# Allegro board 0419_MULTIBB.brd
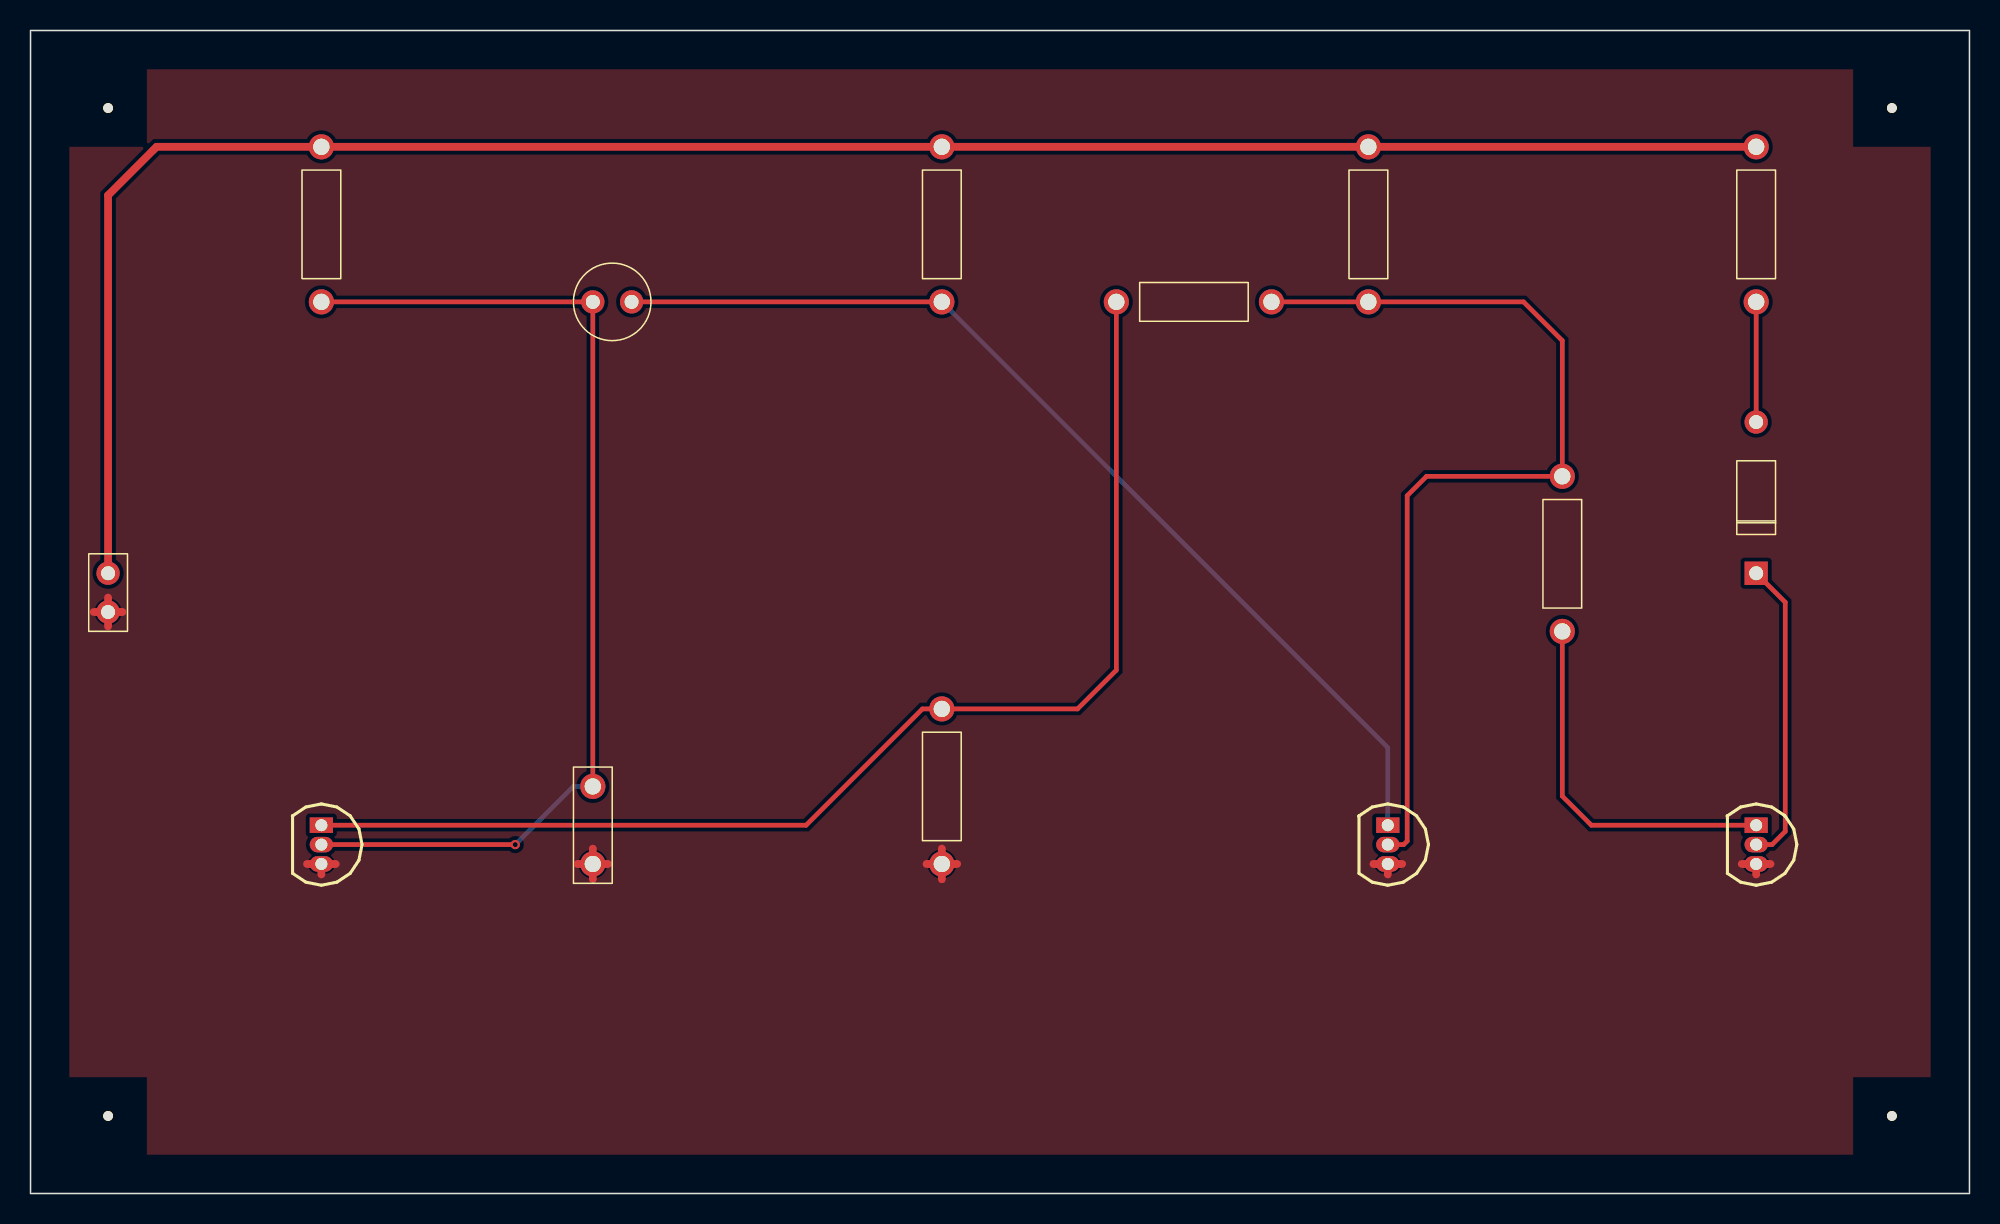
[diagram p0: board, top side]
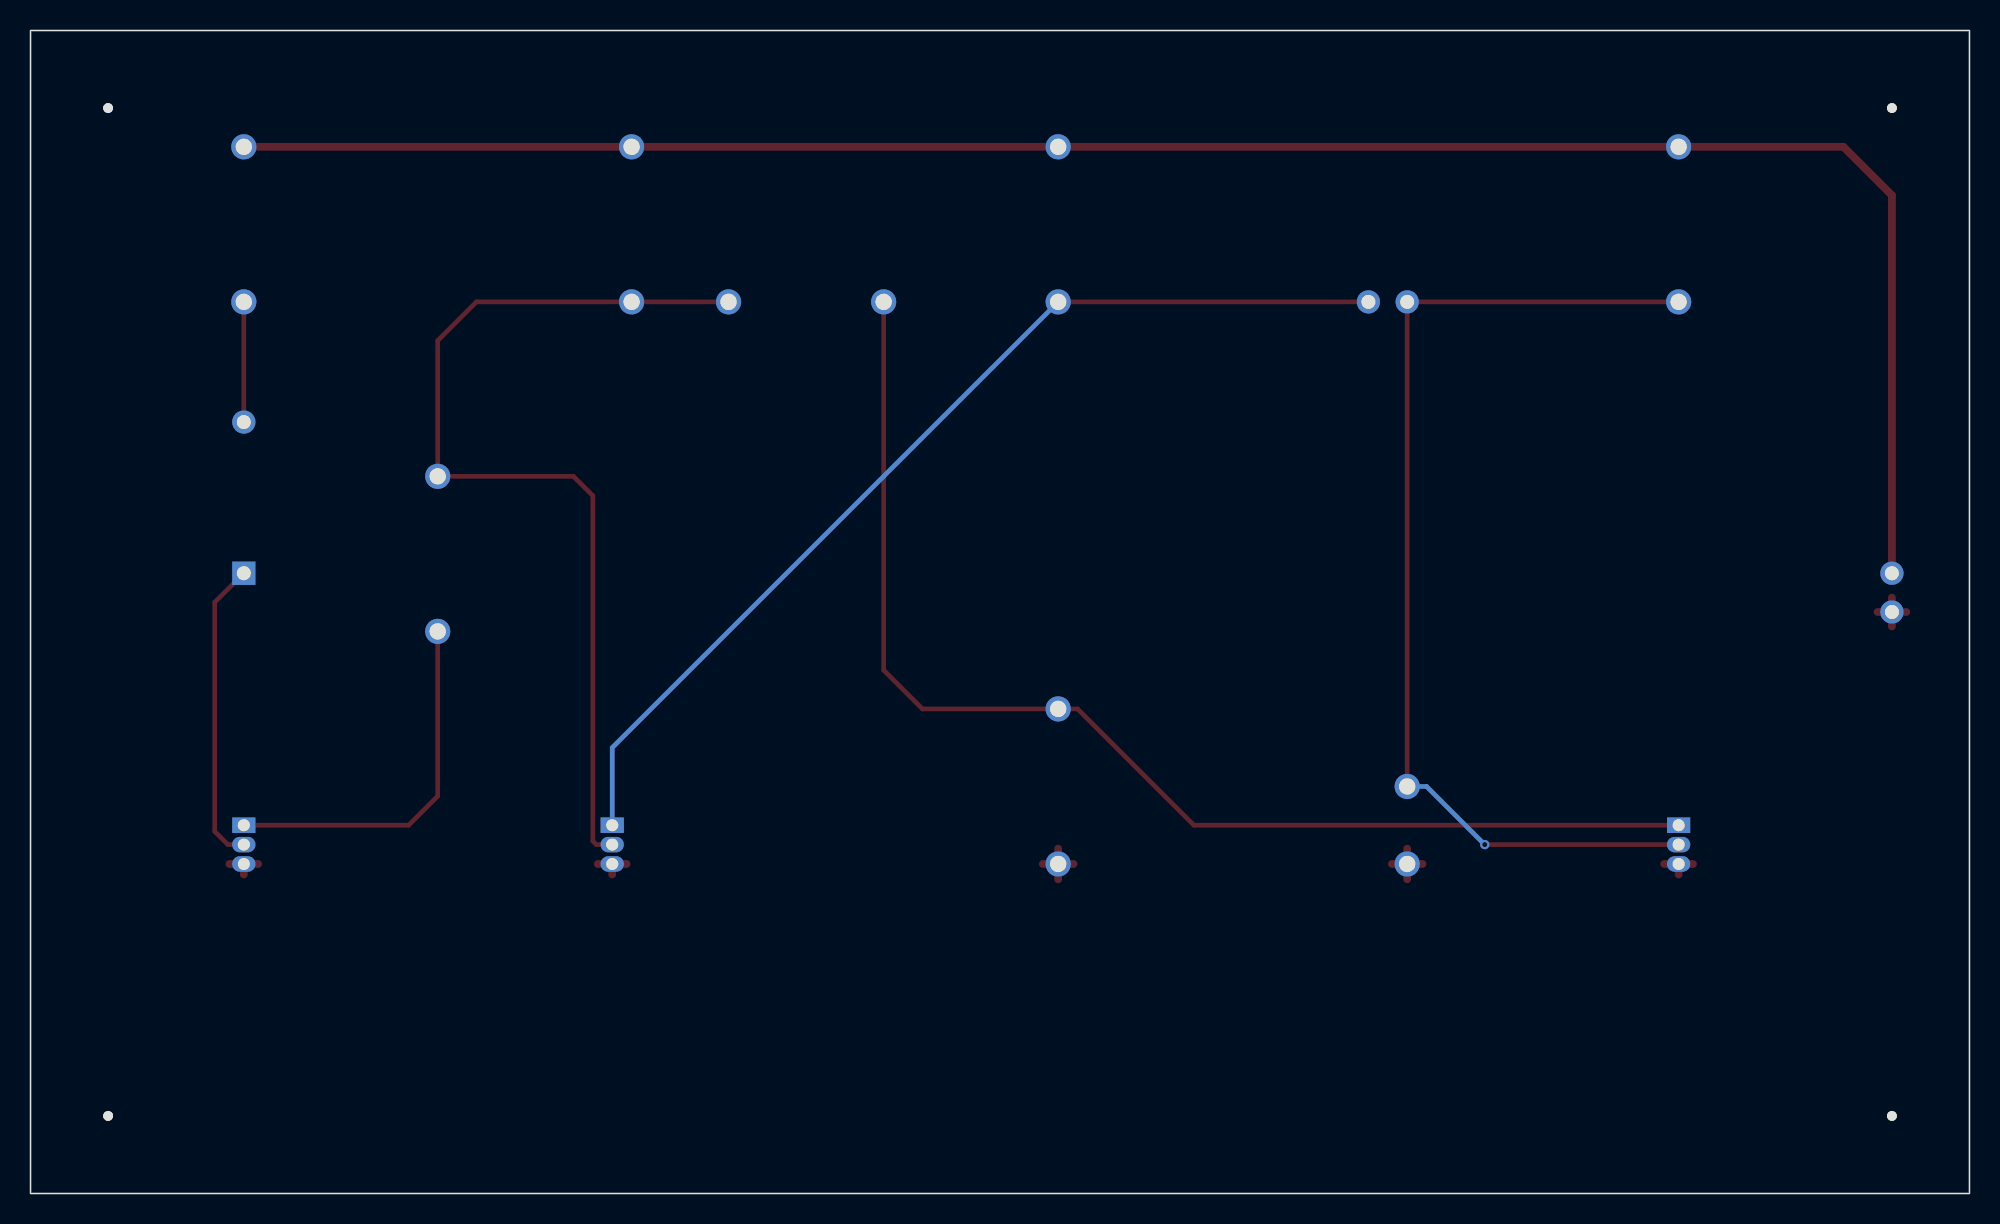
[diagram p1: board, bottom side, seen from below]

Outline 127 x 76.2 mm; copper layers: TOP, BOTTOM. Coordinates in mm from the lower left corner of the outline.
Outline path: rectangle 0,0 127,76.2

## Design rules (mm)
constraint set DEFAULT: min track width 0.305
nets with their own width: min track width 0.508; nets 0 VCC

## Placement (name value [footprint] x y rotation side)
BT1  9  [JUMPER2]  5.08 40.64 270 top
C1  47u  [CAP196]  36.83 58.42 270 top
D1  LED  [DO41]  113.03 40.64 0 top
NOREF  -  []  0 76.2 0 top
NOREF#2  -  [unnamed#2]  121.92 5.08 0 top
NOREF#3  -  [unnamed#2]  5.08 71.12 0 top
NOREF#4  -  [unnamed#2]  121.92 71.12 0 top
NOREF#5  -  [unnamed#2]  5.08 5.08 0 top
NOREF#6  -  []  127 0 90 top
Q1  2N3904  [TO92]  19.05 24.13 270 top
Q2  2N3904  [TO92]  88.9 24.13 270 top
Q3  2N3904  [TO92]  113.03 24.13 270 top
R1  10k  [RES400]  19.05 68.58 180 top
R2  22k  [RES400]  59.69 68.58 180 top
R3  4.7k  [RES400]  87.63 68.58 180 top
R4  6.8k  [RES400]  113.03 68.58 180 top
R5  22k  [RES400]  71.12 58.42 270 top
R6  47k  [RES400]  100.33 36.83 0 top
R7  10k  [RES400]  59.69 21.59 0 top
SW1  SW PUSHBUTTON  [CAPCK06]  36.83 26.67 180 top

## Library data of the parts
BT1 = BATTERY: User Part Number: ***
C1 = CAP POL: Tolerance: ***; User Part Number: ***
D1 = LED
Q1-Q3 = NPN BCE
R1-R7 = R: Tolerance: ***; User Part Number: ***
SW1 = SW PUSHBUTTON: Tolerance: ***; User Part Number: ***

## Footprints (pads in the part's own frame, mm; a bottom-side part is the same pattern mirrored in y, then rotated)
CAP196
  round 1.524 hole 0.914: 1(0,0) 2(0,2.54)
CAPCK06
  round 1.651 hole 1.067: 1(0,0) 2(0,5.08)
DO41
  rect 1.524x1.524 hole 0.914: 1(0,0)
  round 1.524 hole 0.914: 2(0,9.906)
JUMPER2
  round 1.524 hole 0.914: 1(0,0) 2(2.54,0)
RES400
  round 1.651 hole 1.067: 1(0,0) 2(0,10.16)
TO92
  rect 1.016x1.524 hole 0.787: 1(0,0)
  oval 1.016x1.524 hole 0.787: 2(1.27,0) 3(2.54,0)
unnamed#2
  round 0.635 hole 3.175 unplated: (0,0)

## Nets
VCC: BT1.1 R1.1 R2.1 R3.1 R4.1
0: BT1.2(-) Q1.3(E) Q2.3(E) Q3.3(E) R7.1 SW1.2
N00341: C1.1 Q1.2 R1.2 SW1.1
N00463: C1.2 Q2.1 R2.2
N00650: Q1.1 R5.1 R7.2
N00681: Q2.2 R3.2 R5.2 R6.2
N00806: Q3.1 R6.1
N04472: D1.2 R4.2
N05259: D1.1(CATHODE) Q3.2

## Via types
v1: diameter 0.61, hole 0.33, TOP to BOTTOM, 1 via

## Routing (per net, layer and track width the routed paths; a pad name or vN(x,y) marks a point on that pad's centre or on a via; arc(x,y) is an arc through that point)
VCC: length 134
  TOP w0.508: R4.1 R3.1 R2.1 R1.1 8.26,68.58 5.08,65.41 BT1.1
0: length 19.5
  TOP w0.508: 59.69,20.59 R7.1 ; R7.1 58.69,21.59 ; R7.1 59.69,22.59 ; R7.1 60.69,21.59 ; 87.96,21.59 Q2.3 ; Q2.3 89.84,21.59 ; Q2.3 88.9,20.9 ; 4.14,38.1 BT1.2 ; BT1.2 5.08,39.04 ; BT1.2 5.08,37.16 ; BT1.2 6.02,38.1 ; 112.09,21.59 Q3.3 ; Q3.3 113.03,20.9 ; Q3.3 113.97,21.59 ; 35.83,21.59 SW1.2 ; SW1.2 37.83,21.59 ; SW1.2 36.83,20.59 ; SW1.2 36.83,22.59 ; 18.11,21.59 Q1.3 ; Q1.3 19.99,21.59 ; Q1.3 19.05,20.9
N00341: length 68.9
  TOP w0.305: SW1.1 C1.1 R1.2 ; v1(31.75,22.86) Q1.2
  BOTTOM w0.305: v1(31.75,22.86) 35.56,26.67 SW1.1
N00463: length 66.7
  TOP w0.305: R2.2 C1.2
  BOTTOM w0.305: R2.2 88.9,29.21 Q2.1
N00650: length 80.4
  TOP w0.305: R5.1 71.12,34.29 68.58,31.75 R7.2 58.42,31.75 50.8,24.13 Q1.1
N00681: length 63.7
  TOP w0.305: R5.2 R3.2 97.79,58.42 100.33,55.88 R6.2 91.44,46.99 90.17,45.72 90.17,23.09 89.94,22.86 Q2.2
N00806: length 24.3
  TOP w0.305: R6.1 100.33,26.04 102.23,24.13 Q3.1
N04472: length 7.9
  TOP w0.305: R4.2 D1.2
N05259: length 20
  TOP w0.305: Q3.2 114.07,22.86 114.94,23.72 114.94,38.73 D1.1

## Copper pours and planes (outline as drawn; the poured copper is in the pictures)
0 on TOP: 2.54,2.54 2.54,73.66 124.46,73.66 124.46,2.54

## Text on the board
DIMENSION: FIGURE | FINISHED_SIZE | 13.0 | 31.0 | 36.0 | 42.0 | 125.0 | DRILL CHART: TOP to BOTTOM | ALL UNITS ARE IN MILS | PLATED | NON-PLATED | QTY | 1 | 9 | 6 | 16 | 4
